# EAGLE board AAA_PowerSupply_Multi (EAGLE 9.6.2)
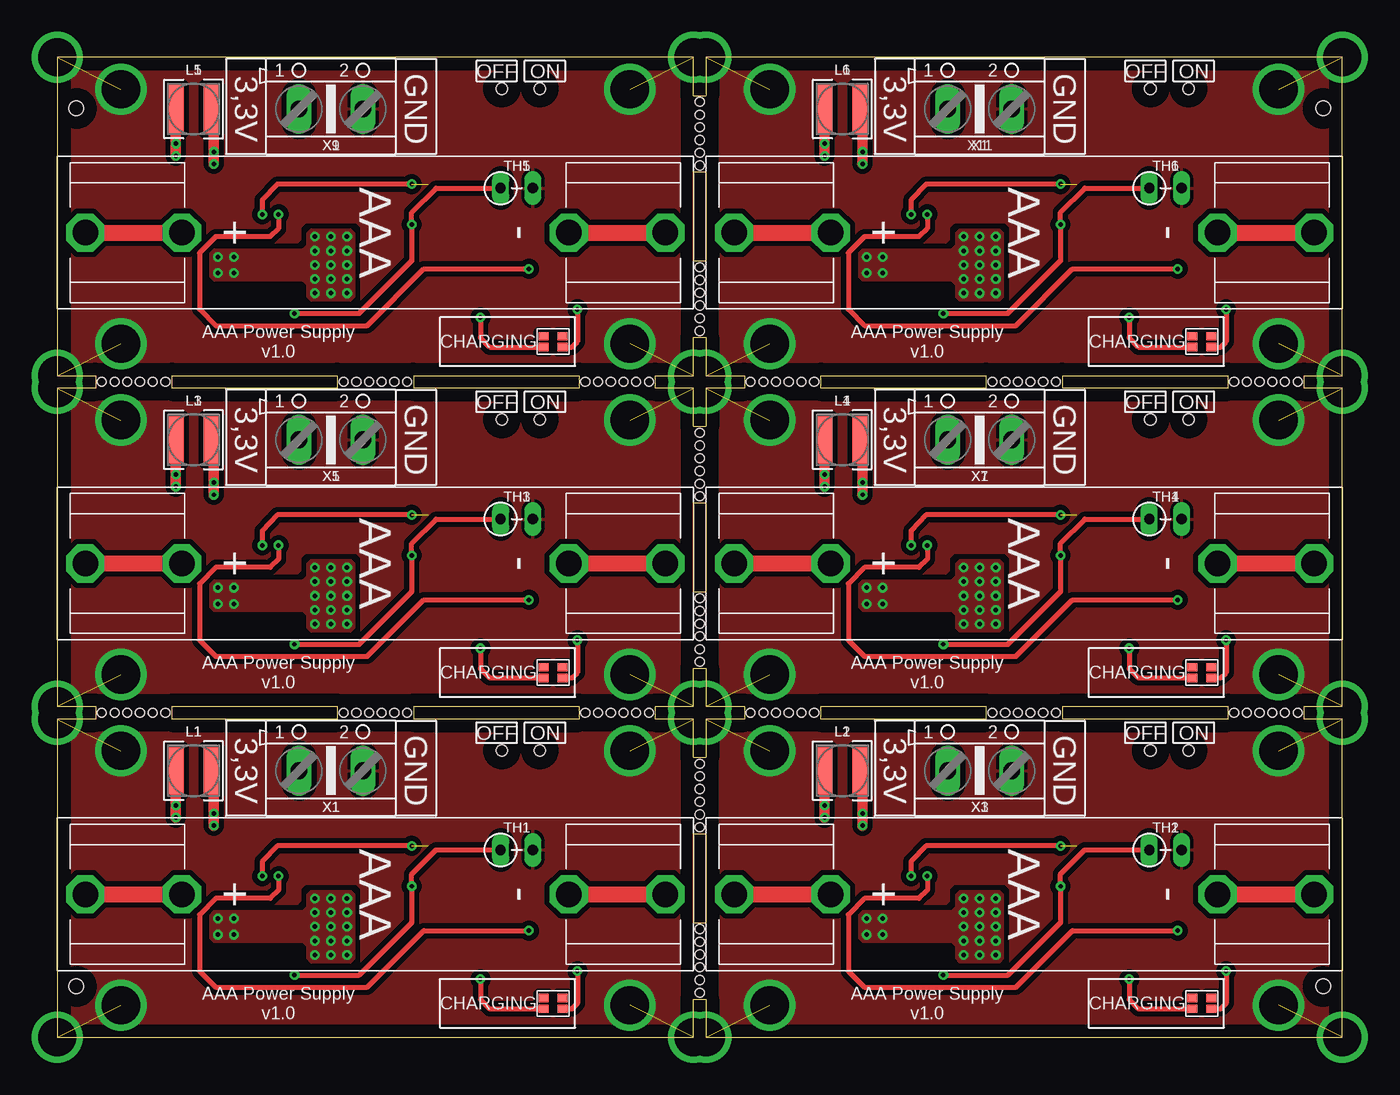
[diagram p0: board, top side]
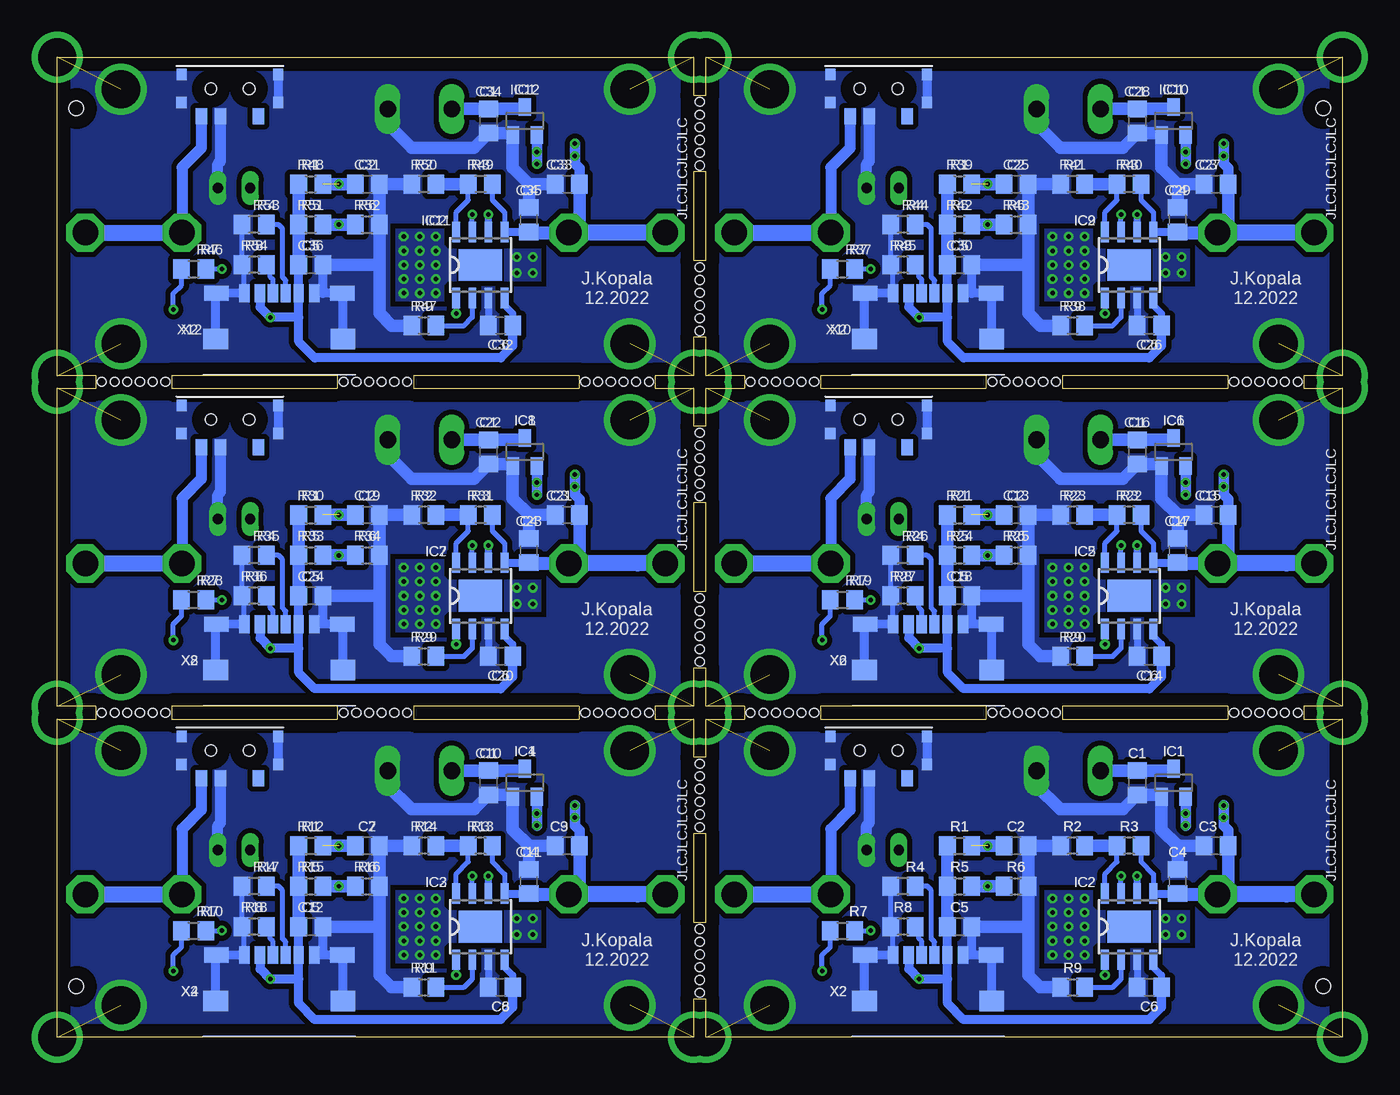
[diagram p1: board, bottom side, seen from below]

Size 101 x 77 mm. Coordinates in mm from the lower left corner, seen from the top.
Outline: 0,0 50,0 50,3 51,3 51,0 101,0 101,25 98,25 98,26 101,26 101,51 98,51 98,52 101,52 101,77 51,77 51,74 50,74 50,77 0,77 0,52 3,52 3,51 0,51 0,26 3,26 3,25 0,25 0,0
Outline: 50,9 50,16 51,16 51,9 50,9
Outline: 50,22 50,25 47,25 47,26 50,26 50,29 51,29 51,26 54,26 54,25 51,25 51,22 50,22
Outline: 41,25 28,25 28,26 41,26 41,25
Outline: 22,25 9,25 9,26 22,26 22,25
Outline: 92,25 79,25 79,26 92,26 92,25
Outline: 73,25 60,25 60,26 73,26 73,25
Outline: 50,35 50,42 51,42 51,35 50,35
Outline: 50,48 50,51 47,51 47,52 50,52 50,55 51,55 51,52 54,52 54,51 51,51 51,48 50,48
Outline: 41,51 28,51 28,52 41,52 41,51
Outline: 22,51 9,51 9,52 22,52 22,51
Outline: 92,51 79,51 79,52 92,52 92,51
Outline: 73,51 60,51 60,52 73,52 73,51
Outline: 50,61 50,68 51,68 51,61 50,61
Copper layers (1*16): Top 0.035mm / dielectric 1.5mm / Bottom 0.035mm
Design rules "default": minimum track width 6mil, minimum drill 0.35mm, track to track 6mil, track to pad 6mil, pad to pad 6mil, via to via 6mil, smd to smd 6mil, copper to edge 40mil, drill to drill 6mil, minimum pad ring 10mil, minimum via ring 8mil, stop-mask expansion 4mil, vias tented up to drill 0mil, thermal gap 10mil
Holes 0.7 mm at 50.5,16.5 50.5,17.5 50.5,18.5 50.5,19.5 50.5,20.5 50.5,21.5 50.5,3.5 50.5,4.5 50.5,5.5 50.5,6.5 50.5,7.5 50.5,8.5 46.5,25.5 45.5,25.5 44.5,25.5 43.5,25.5 42.5,25.5 41.5,25.5 59.5,25.5 58.5,25.5 57.5,25.5 56.5,25.5 55.5,25.5 54.5,25.5 97.5,25.5 96.5,25.5 95.5,25.5 94.5,25.5 93.5,25.5 92.5,25.5 8.5,25.5 7.5,25.5 6.5,25.5 5.5,25.5 4.5,25.5 3.5,25.5 27.5,25.5 26.5,25.5 25.5,25.5 24.5,25.5 23.5,25.5 22.5,25.5 78.5,25.5 77.5,25.5 76.5,25.5 75.5,25.5 74.5,25.5 73.5,25.5 50.5,42.5 50.5,43.5 50.5,44.5 50.5,45.5 50.5,46.5 50.5,47.5 50.5,29.5 50.5,30.5 50.5,31.5 50.5,32.5 50.5,33.5 50.5,34.5 46.5,51.5 45.5,51.5 44.5,51.5 43.5,51.5 42.5,51.5 41.5,51.5 59.5,51.5 58.5,51.5 57.5,51.5 56.5,51.5 55.5,51.5 54.5,51.5 97.5,51.5 96.5,51.5 95.5,51.5 94.5,51.5 93.5,51.5 92.5,51.5 8.5,51.5 7.5,51.5 6.5,51.5 5.5,51.5 4.5,51.5 3.5,51.5 27.5,51.5 26.5,51.5 25.5,51.5 24.5,51.5 23.5,51.5 22.5,51.5 78.5,51.5 77.5,51.5 76.5,51.5 75.5,51.5 74.5,51.5 73.5,51.5 50.5,68.5 50.5,69.5 50.5,70.5 50.5,71.5 50.5,72.5 50.5,73.5 50.5,55.5 50.5,56.5 50.5,57.5 50.5,58.5 50.5,59.5 50.5,60.5
Holes 1.15 mm at 1.5,4 99.5,4 1.5,73 99.5,73

## Footprints (pad centres in the part's own frame; a part is rotated, then mirrored left to right if it is on the bottom)
BC-0401 = drill 2 octagon: 1 -22.8,0; 2 -15.2,0; 3 15.2,0; 4 22.8,0
C0805 = smd 1.3 x 1.5: 1 -0.95,0; 2 0.95,0
SOT23 = smd 1 x 1.4: 1 -0.95,-1.1; 2 0.95,-1.1; 3 0,1.1
SOP8_THERMAL = smd 0.6 x 1.6: 1 -1.905,-2.6; 2 -0.635,-2.6; 3 0.635,-2.6; 4 1.905,-2.6; 5 1.905,2.6; 6 0.635,2.6; 7 -0.635,2.6; 8 -1.905,2.6 | smd 3.4 x 2.5: THERMAL 0,0
L-4X4 = smd 1.2 x 3.7: 1 -1.4,0; 2 1.4,0
WL-SFCW-0603 = smd 0.8 x 0.65: P$1 -0.75,0.425; P$2 0.75,0.425; P$3 -0.75,-0.425; P$4 0.75,-0.425
R0805 = smd 1.3 x 1.5: 1 -0.95,0; 2 0.95,0
K3-1296S-E2 = smd 0.9 x 1.25: O -2.25,-2.175; P -0.75,-2.175; S 2.25,-2.175 | smd 0.8 x 0.9: SH1 -3.8,1.1; SH2 3.8,1.1; SH3 -3.82,-1.1; SH4 3.8,-1.1 | hole 0.9: -1.5,0; 1.5,0
RS-2,5 = drill 0.813 long: 1 -1.27,0; 2 1.27,0
AK500/2 = drill 1.321 long: 1 -2.515,0; 2 2.515,0
HC-TYPE-C-6P-01QT = smd 0.8 x 1.4: A5 0.5,2.85; A9 -1.52,2.85; A12 -2.75,2.85; B5 -0.5,2.85; B9 1.52,2.85; B12 2.75,2.85 | smd 1.95 x 1.2: SH1 -4.95,2.85; SH3 4.95,2.85 | smd 1.95 x 1.6: SH2 -5,-0.75; SH4 5,-0.75

## Placement (x,y rotation side)
BAT1  BC-0401  [BC-0401]  25,11.23 180 top
BAT2  BC-0401  [BC-0401]  76,11.23 180 top
BAT3  BC-0401  [BC-0401]  25,37.23 180 top
BAT4  BC-0401  [BC-0401]  76,37.23 180 top
BAT5  BC-0401  [BC-0401]  25,63.23 180 top
BAT6  BC-0401  [BC-0401]  76,63.23 180 top
C1  10uF  [C0805]  16.11,20 270 bottom
C2  1uF  [C0805]  25.64,15.04 0 bottom
C3  10uF  [C0805]  9.92,15.04 180 bottom
C4  10uF  [C0805]  12.94,12.24 90 bottom
C5  10uF  [C0805]  30.08,8.69 0 bottom
C6  10uF  [C0805]  15.16,3.93 180 bottom
C7  1uF  [C0805]  76.64,15.04 0 bottom
C8  10uF  [C0805]  66.16,3.93 180 bottom
C9  10uF  [C0805]  60.92,15.04 180 bottom
C10  10uF  [C0805]  67.11,20 270 bottom
C11  10uF  [C0805]  63.94,12.24 90 bottom
C12  10uF  [C0805]  81.08,8.69 0 bottom
C13  1uF  [C0805]  25.64,41.04 0 bottom
C14  10uF  [C0805]  15.16,29.93 180 bottom
C15  10uF  [C0805]  9.92,41.04 180 bottom
C16  10uF  [C0805]  16.11,46 270 bottom
C17  10uF  [C0805]  12.94,38.24 90 bottom
C18  10uF  [C0805]  30.08,34.69 0 bottom
C19  1uF  [C0805]  76.64,41.04 0 bottom
C20  10uF  [C0805]  66.16,29.93 180 bottom
C21  10uF  [C0805]  60.92,41.04 180 bottom
C22  10uF  [C0805]  67.11,46 270 bottom
C23  10uF  [C0805]  63.94,38.24 90 bottom
C24  10uF  [C0805]  81.08,34.69 0 bottom
C25  1uF  [C0805]  25.64,67.04 0 bottom
C26  10uF  [C0805]  15.16,55.93 180 bottom
C27  10uF  [C0805]  9.92,67.04 180 bottom
C28  10uF  [C0805]  16.11,72 270 bottom
C29  10uF  [C0805]  12.94,64.24 90 bottom
C30  10uF  [C0805]  30.08,60.69 0 bottom
C31  1uF  [C0805]  76.64,67.04 0 bottom
C32  10uF  [C0805]  66.16,55.93 180 bottom
C33  10uF  [C0805]  60.92,67.04 180 bottom
C34  10uF  [C0805]  67.11,72 270 bottom
C35  10uF  [C0805]  63.94,64.24 90 bottom
C36  10uF  [C0805]  81.08,60.69 0 bottom
IC1  BL8536  [SOT23]  13.25,20 0 bottom
IC2  CN3085  [SOP8_THERMAL]  16.75,8.69 0 bottom
IC3  CN3085  [SOP8_THERMAL]  67.75,8.69 0 bottom
IC4  BL8536  [SOT23]  64.25,20 0 bottom
IC5  CN3085  [SOP8_THERMAL]  16.75,34.69 0 bottom
IC6  BL8536  [SOT23]  13.25,46 0 bottom
IC7  CN3085  [SOP8_THERMAL]  67.75,34.69 0 bottom
IC8  BL8536  [SOT23]  64.25,46 0 bottom
IC9  CN3085  [SOP8_THERMAL]  16.75,60.69 0 bottom
IC10  BL8536  [SOT23]  13.25,72 0 bottom
IC11  CN3085  [SOP8_THERMAL]  67.75,60.69 0 bottom
IC12  BL8536  [SOT23]  64.25,72 0 bottom
L1  PSPNAQ4020-2R2M  [L-4X4]  10.71,20.95 0 top
L2  PSPNAQ4020-2R2M  [L-4X4]  61.71,20.95 0 top
L3  PSPNAQ4020-2R2M  [L-4X4]  10.71,46.95 0 top
L4  PSPNAQ4020-2R2M  [L-4X4]  61.71,46.95 0 top
L5  PSPNAQ4020-2R2M  [L-4X4]  10.71,72.95 0 top
L6  PSPNAQ4020-2R2M  [L-4X4]  61.71,72.95 0 top
LED1  LSG-T676  [WL-SFCW-0603]  38.97,2.66 180 top
LED2  LSG-T676  [WL-SFCW-0603]  89.97,2.66 180 top
LED3  LSG-T676  [WL-SFCW-0603]  38.97,28.66 180 top
LED4  LSG-T676  [WL-SFCW-0603]  89.97,28.66 180 top
LED5  LSG-T676  [WL-SFCW-0603]  38.97,54.66 180 top
LED6  LSG-T676  [WL-SFCW-0603]  89.97,54.66 180 top
R1  47k  [R0805]  30.08,15.04 0 bottom
R2  10k  [R0805]  21.19,15.04 180 bottom
R3  2,7k  [R0805]  16.75,15.04 180 bottom
R4  5,1k  [R0805]  34.52,11.87 180 bottom
R5  5,6k  [R0805]  30.08,11.87 0 bottom
R6  68k  [R0805]  25.64,11.87 0 bottom
R7  1k  [R0805]  39.29,8.37 0 bottom
R8  5,1k  [R0805]  34.52,8.69 180 bottom
R9  2,7k  [R0805]  21.19,3.93 0 bottom
R10  1k  [R0805]  90.29,8.37 0 bottom
R11  2,7k  [R0805]  72.19,3.93 0 bottom
R12  47k  [R0805]  81.08,15.04 0 bottom
R13  2,7k  [R0805]  67.75,15.04 180 bottom
R14  10k  [R0805]  72.19,15.04 180 bottom
R15  5,6k  [R0805]  81.08,11.87 0 bottom
R16  68k  [R0805]  76.64,11.87 0 bottom
R17  5,1k  [R0805]  85.53,11.87 180 bottom
R18  5,1k  [R0805]  85.53,8.69 180 bottom
R19  1k  [R0805]  39.29,34.37 0 bottom
R20  2,7k  [R0805]  21.19,29.93 0 bottom
R21  47k  [R0805]  30.08,41.04 0 bottom
R22  2,7k  [R0805]  16.75,41.04 180 bottom
R23  10k  [R0805]  21.19,41.04 180 bottom
R24  5,6k  [R0805]  30.08,37.87 0 bottom
R25  68k  [R0805]  25.64,37.87 0 bottom
R26  5,1k  [R0805]  34.52,37.87 180 bottom
R27  5,1k  [R0805]  34.52,34.69 180 bottom
R28  1k  [R0805]  90.29,34.37 0 bottom
R29  2,7k  [R0805]  72.19,29.93 0 bottom
R30  47k  [R0805]  81.08,41.04 0 bottom
R31  2,7k  [R0805]  67.75,41.04 180 bottom
R32  10k  [R0805]  72.19,41.04 180 bottom
R33  5,6k  [R0805]  81.08,37.87 0 bottom
R34  68k  [R0805]  76.64,37.87 0 bottom
R35  5,1k  [R0805]  85.53,37.87 180 bottom
R36  5,1k  [R0805]  85.53,34.69 180 bottom
R37  1k  [R0805]  39.29,60.37 0 bottom
R38  2,7k  [R0805]  21.19,55.93 0 bottom
R39  47k  [R0805]  30.08,67.04 0 bottom
R40  2,7k  [R0805]  16.75,67.04 180 bottom
R41  10k  [R0805]  21.19,67.04 180 bottom
R42  5,6k  [R0805]  30.08,63.87 0 bottom
R43  68k  [R0805]  25.64,63.87 0 bottom
R44  5,1k  [R0805]  34.52,63.87 180 bottom
R45  5,1k  [R0805]  34.52,60.69 180 bottom
R46  1k  [R0805]  90.29,60.37 0 bottom
R47  2,7k  [R0805]  72.19,55.93 0 bottom
R48  47k  [R0805]  81.08,67.04 0 bottom
R49  2,7k  [R0805]  67.75,67.04 180 bottom
R50  10k  [R0805]  72.19,67.04 180 bottom
R51  5,6k  [R0805]  81.08,63.87 0 bottom
R52  68k  [R0805]  76.64,63.87 0 bottom
R53  5,1k  [R0805]  85.53,63.87 180 bottom
R54  5,1k  [R0805]  85.53,60.69 180 bottom
SW1  K3-1296S-E2  [K3-1296S-E2]  36.43,22.54 0 bottom
SW2  K3-1296S-E2  [K3-1296S-E2]  87.43,22.54 0 bottom
SW3  K3-1296S-E2  [K3-1296S-E2]  36.43,48.54 0 bottom
SW4  K3-1296S-E2  [K3-1296S-E2]  87.43,48.54 0 bottom
SW5  K3-1296S-E2  [K3-1296S-E2]  36.43,74.54 0 bottom
SW6  K3-1296S-E2  [K3-1296S-E2]  87.43,74.54 0 bottom
TH1  NTCC-10K  [RS-2,5]  36.11,14.72 0 top
TH2  NTCC-10K  [RS-2,5]  87.11,14.72 0 top
TH3  NTCC-10K  [RS-2,5]  36.11,40.72 0 top
TH4  NTCC-10K  [RS-2,5]  87.11,40.72 0 top
TH5  NTCC-10K  [RS-2,5]  36.11,66.72 0 top
TH6  NTCC-10K  [RS-2,5]  87.11,66.72 0 top
X1  [AK500/2]  21.51,20.95 0 top
X2  HC-TYPE-C-6P-01QT  [HC-TYPE-C-6P-01QT]  32.55,3.61 0 bottom
X3  [AK500/2]  72.51,20.95 0 top
X4  HC-TYPE-C-6P-01QT  [HC-TYPE-C-6P-01QT]  83.55,3.61 0 bottom
X5  [AK500/2]  21.51,46.95 0 top
X6  HC-TYPE-C-6P-01QT  [HC-TYPE-C-6P-01QT]  32.55,29.61 0 bottom
X7  [AK500/2]  72.51,46.95 0 top
X8  HC-TYPE-C-6P-01QT  [HC-TYPE-C-6P-01QT]  83.55,29.61 0 bottom
X9  [AK500/2]  21.51,72.95 0 top
X10  HC-TYPE-C-6P-01QT  [HC-TYPE-C-6P-01QT]  32.55,55.61 0 bottom
X11  [AK500/2]  72.51,72.95 0 top
X12  HC-TYPE-C-6P-01QT  [HC-TYPE-C-6P-01QT]  83.55,55.61 0 bottom

## Library data of the parts
BAT1-BAT6 IC1-IC12 LED1-LED6 SW1-SW6 X2 X4 X6 X8 X10 X12 = custom_jatsekku
C1-C36 = rcl; SPICEPREFIX: C
L1-L6 = dp_devices.v6
R1-R54 = rcl; SPICEPREFIX: R
TH1-TH6 = varistor
X1 X3 X5 X7 X9 X11 = con-ptr500; OC_FARNELL: unknown; OC_NEWARK: unknown

## Nets
BAT: BAT1.3 BAT1.4 C3.1 C4.1 IC2.5 L1.1 R3.1
BAT1: BAT2.3 BAT2.4 C9.1 C11.1 IC3.5 L2.1 R13.1
BAT2: BAT3.3 BAT3.4 C15.1 C17.1 IC5.5 L3.1 R22.1
BAT3: BAT4.3 BAT4.4 C21.1 C23.1 IC7.5 L4.1 R31.1
BAT4: BAT5.3 BAT5.4 C27.1 C29.1 IC9.5 L5.1 R40.1
BAT5: BAT6.3 BAT6.4 C33.1 C35.1 IC11.5 L6.1 R49.1
GND: C1.2 C2.2 C3.2 C4.2 C5.2 C6.2 IC1.1 IC2.3 R2.2 R4.2 R6.2 R8.2 R9.1 SW1.P SW1.SH1 SW1.SH2 SW1.SH3 SW1.SH4 TH1.2 X1.2 X2.A12 X2.B12 X2.SH1 X2.SH2 X2.SH3 X2.SH4
GND1: C7.2 C8.2 C9.2 C10.2 C11.2 C12.2 IC3.3 IC4.1 R11.1 R14.2 R16.2 R17.2 R18.2 SW2.P SW2.SH1 SW2.SH2 SW2.SH3 SW2.SH4 TH2.2 X3.2 X4.A12 X4.B12 X4.SH1 X4.SH2 X4.SH3 X4.SH4
GND2: C13.2 C14.2 C15.2 C16.2 C17.2 C18.2 IC5.3 IC6.1 R20.1 R23.2 R25.2 R26.2 R27.2 SW3.P SW3.SH1 SW3.SH2 SW3.SH3 SW3.SH4 TH3.2 X5.2 X6.A12 X6.B12 X6.SH1 X6.SH2 X6.SH3 X6.SH4
GND3: C19.2 C20.2 C21.2 C22.2 C23.2 C24.2 IC7.3 IC8.1 R29.1 R32.2 R34.2 R35.2 R36.2 SW4.P SW4.SH1 SW4.SH2 SW4.SH3 SW4.SH4 TH4.2 X7.2 X8.A12 X8.B12 X8.SH1 X8.SH2 X8.SH3 X8.SH4
GND4: C25.2 C26.2 C27.2 C28.2 C29.2 C30.2 IC9.3 IC10.1 R38.1 R41.2 R43.2 R44.2 R45.2 SW5.P SW5.SH1 SW5.SH2 SW5.SH3 SW5.SH4 TH5.2 X9.2 X10.A12 X10.B12 X10.SH1 X10.SH2 X10.SH3 X10.SH4
GND5: C31.2 C32.2 C33.2 C34.2 C35.2 C36.2 IC11.3 IC12.1 R47.1 R50.2 R52.2 R53.2 R54.2 SW6.P SW6.SH1 SW6.SH2 SW6.SH3 SW6.SH4 TH6.2 X11.2 X12.A12 X12.B12 X12.SH1 X12.SH2 X12.SH3 X12.SH4
N$1: C7.1 IC3.6 R12.2
N$2: IC2.7 R7.2
N$3: LED1.P$1 R7.1
N$4: C2.1 IC2.6 R1.2
N$5: IC2.2 R9.2
N$6: C1.1 IC1.3 X1.1
N$7: IC3.2 R11.2
N$8: IC1.2 L1.2
N$9: IC2.8 R2.1 R3.2
N$10: C10.1 IC4.3 X3.1
N$11: IC4.2 L2.2
N$12: IC2.1 R5.2 R6.1 TH1.1
N$13: IC3.8 R13.2 R14.1
N$14: IC3.1 R15.2 R16.1 TH2.1
N$15: IC3.7 R10.2
N$16: LED2.P$1 R10.1
N$17: BAT1.1 BAT1.2 SW1.O
N$18: R4.1 X2.A5
N$19: R8.1 X2.B5
N$20: BAT2.1 BAT2.2 SW2.O
N$21: R17.1 X4.A5
N$22: R18.1 X4.B5
N$23: C13.1 IC5.6 R21.2
N$24: IC5.2 R20.2
N$25: C16.1 IC6.3 X5.1
N$26: IC6.2 L3.2
N$27: IC5.8 R22.2 R23.1
N$28: IC5.1 R24.2 R25.1 TH3.1
N$29: IC5.7 R19.2
N$30: LED3.P$1 R19.1
N$31: BAT3.1 BAT3.2 SW3.O
N$32: R26.1 X6.A5
N$33: R27.1 X6.B5
N$34: C19.1 IC7.6 R30.2
N$35: IC7.2 R29.2
N$36: C22.1 IC8.3 X7.1
N$37: IC8.2 L4.2
N$38: IC7.8 R31.2 R32.1
N$39: IC7.1 R33.2 R34.1 TH4.1
N$40: IC7.7 R28.2
N$41: LED4.P$1 R28.1
N$42: BAT4.1 BAT4.2 SW4.O
N$43: R35.1 X8.A5
N$44: R36.1 X8.B5
N$45: C25.1 IC9.6 R39.2
N$46: IC9.2 R38.2
N$47: C28.1 IC10.3 X9.1
N$48: IC10.2 L5.2
N$49: IC9.8 R40.2 R41.1
N$50: IC9.1 R42.2 R43.1 TH5.1
N$51: IC9.7 R37.2
N$52: LED5.P$1 R37.1
N$53: BAT5.1 BAT5.2 SW5.O
N$54: R44.1 X10.A5
N$55: R45.1 X10.B5
N$56: C31.1 IC11.6 R48.2
N$57: IC11.2 R47.2
N$58: C34.1 IC12.3 X11.1
N$59: IC12.2 L6.2
N$60: IC11.8 R49.2 R50.1
N$61: IC11.1 R51.2 R52.1 TH6.1
N$62: IC11.7 R46.2
N$63: LED6.P$1 R46.1
N$64: BAT6.1 BAT6.2 SW6.O
N$65: R53.1 X12.A5
N$66: R54.1 X12.B5
VCC: C5.1 C6.1 IC2.4 LED1.P$2 R1.1 R5.1 X2.A9 X2.B9
VCC1: C8.1 C12.1 IC3.4 LED2.P$2 R12.1 R15.1 X4.A9 X4.B9
VCC2: C14.1 C18.1 IC5.4 LED3.P$2 R21.1 R24.1 X6.A9 X6.B9
VCC3: C20.1 C24.1 IC7.4 LED4.P$2 R30.1 R33.1 X8.A9 X8.B9
VCC4: C26.1 C30.1 IC9.4 LED5.P$2 R39.1 R42.1 X10.A9 X10.B9
VCC5: C32.1 C36.1 IC11.4 LED6.P$2 R48.1 R51.1 X12.A9 X12.B9

## Tracks (layer width: path | path; a pad name or v marks a point on that pad's centre or on a via)
BAT  (via drill 0.35)
  Top 0.813: L1.1 v9.31,18.21 v9.31,17.26
  Top 1.27: BAT1.4 BAT1.3
  Bottom 0.406: IC2.5 14.84,12.82 15.79,13.77 R3.1
  Bottom 0.61: IC2.5 C4.1
  Bottom 0.813: C3.1 8.97,16.28 9.31,16.63 v9.31,17.26 v9.31,18.21
  Bottom 0.965: 12.84,11.2 C4.1 12.88,11.23 | 8.81,14.88 C3.1 8.97,12.06 BAT1.3
  Bottom 1.016: 12.88,11.23 BAT1.3 | 4.24,11.35 4.36,11.23
  Bottom 1.27: BAT1.4 4.36,11.23 BAT1.3
BAT1  (via drill 0.35)
  Top 0.813: L2.1 v60.31,18.21 v60.31,17.26
  Top 1.27: BAT2.4 BAT2.3
  Bottom 0.406: IC3.5 65.84,12.82 66.8,13.77 R13.1
  Bottom 0.61: IC3.5 C11.1
  Bottom 0.813: C9.1 59.97,16.28 60.31,16.63 v60.31,17.26 v60.31,18.21
  Bottom 0.965: 63.84,11.2 C11.1 63.88,11.23 | 59.81,14.88 C9.1 59.97,12.06 BAT2.3
  Bottom 1.016: 63.88,11.23 BAT2.3 | 55.24,11.35 55.36,11.23
  Bottom 1.27: BAT2.4 55.36,11.23 BAT2.3
BAT2  (via drill 0.35)
  Top 0.813: L3.1 v9.31,44.22 v9.31,43.26
  Top 1.27: BAT3.4 BAT3.3
  Bottom 0.406: IC5.5 14.84,38.82 15.79,39.77 R22.1
  Bottom 0.61: IC5.5 C17.1
  Bottom 0.813: C15.1 8.97,42.28 9.31,42.63 v9.31,43.26 v9.31,44.22
  Bottom 0.965: 12.84,37.2 C17.1 12.88,37.23 | 8.81,40.88 C15.1 8.97,38.06 BAT3.3
  Bottom 1.016: 12.88,37.23 BAT3.3 | 4.24,37.35 4.36,37.23
  Bottom 1.27: BAT3.4 4.36,37.23 BAT3.3
BAT3  (via drill 0.35)
  Top 0.813: L4.1 v60.31,44.22 v60.31,43.26
  Top 1.27: BAT4.4 BAT4.3
  Bottom 0.406: IC7.5 65.84,38.82 66.8,39.77 R31.1
  Bottom 0.61: IC7.5 C23.1
  Bottom 0.813: C21.1 59.97,42.28 60.31,42.63 v60.31,43.26 v60.31,44.22
  Bottom 0.965: 63.84,37.2 C23.1 63.88,37.23 | 59.81,40.88 C21.1 59.97,38.06 BAT4.3
  Bottom 1.016: 63.88,37.23 BAT4.3 | 55.24,37.35 55.36,37.23
  Bottom 1.27: BAT4.4 55.36,37.23 BAT4.3
BAT4  (via drill 0.35)
  Top 0.813: L5.1 v9.31,70.22 v9.31,69.26
  Top 1.27: BAT5.4 BAT5.3
  Bottom 0.406: IC9.5 14.84,64.82 15.79,65.77 R40.1
  Bottom 0.61: IC9.5 C29.1
  Bottom 0.813: C27.1 8.97,68.28 9.31,68.63 v9.31,69.26 v9.31,70.22
  Bottom 0.965: 12.84,63.2 C29.1 12.88,63.23 | 8.81,66.88 C27.1 8.97,64.06 BAT5.3
  Bottom 1.016: 12.88,63.23 BAT5.3 | 4.24,63.35 4.36,63.23
  Bottom 1.27: BAT5.4 4.36,63.23 BAT5.3
BAT5  (via drill 0.35)
  Top 0.813: L6.1 v60.31,70.22 v60.31,69.26
  Top 1.27: BAT6.4 BAT6.3
  Bottom 0.406: IC11.5 65.84,64.82 66.8,65.77 R49.1
  Bottom 0.61: IC11.5 C35.1
  Bottom 0.813: C33.1 59.97,68.28 60.31,68.63 v60.31,69.26 v60.31,70.22
  Bottom 0.965: 63.84,63.2 C35.1 63.88,63.23 | 59.81,66.88 C33.1 59.97,64.06 BAT6.3
  Bottom 1.016: 63.88,63.23 BAT6.3 | 55.24,63.35 55.36,63.23
  Bottom 1.27: BAT6.4 55.36,63.23 BAT6.3
GND  (via drill 3)  (4 unrouted)
  Bottom 0.406: R4.2 R8.2 35.3,8.52 X2.A12
  Bottom 0.508: R6.2
  Bottom 0.559: IC2.3 C6.2
  Bottom 0.711: C5.2 29.13,6.46 | X2.SH4 27.55,6.41 X2.SH3 29.13,6.46 | X2.SH2 37.55,6.41 X2.SH1 X2.A12 | 29.13,6.46 X2.B12 | SW1.SH2 SW1.SH4
  Bottom 0.864: SW1.P 37.18,16.83 37.38,16.63 TH1.2
  Bottom 0.965: R2.2 C2.2 24.68,15.04 R6.2 24.68,8.69 | 24.68,8.69 24.68,4.88 23.73,3.93 R9.1 | C5.2 24.68,8.69 | C3.2 12.94,15.04 | 12.94,15.04 C4.2 | 12.94,15.04 14.2,16.31 IC1.1 14.35,19.05 C1.2 17.26,17.9 22.14,17.9 24.02,19.78 X1.2
  other vias: 5,2.5 5,22.5 45,2.5 45,22.5 0,0 0,25 50,0 50,25
  pour Bottom (isolate 0.406, rank 2, no thermals): 1,1 1,24 49,24 49,1
  pour Top (isolate 0.406, rank 2): 1,1 1,24 49,24 49,1
GND1  (via drill 3)  (4 unrouted)
  Bottom 0.406: R17.2 R18.2 86.3,8.52 X4.A12
  Bottom 0.508: R16.2
  Bottom 0.559: IC3.3 C8.2
  Bottom 0.711: C12.2 80.13,6.46 | X4.SH4 78.55,6.41 X4.SH3 80.13,6.46 | X4.SH2 88.55,6.41 X4.SH1 X4.A12 | 80.13,6.46 X4.B12 | SW2.SH2 SW2.SH4
  Bottom 0.864: SW2.P 88.18,16.83 88.38,16.63 TH2.2
  Bottom 0.965: R14.2 C7.2 R16.2 75.68,8.69 | 75.68,8.69 75.69,4.88 74.73,3.93 R11.1 | C12.2 75.68,8.69 | C9.2 63.94,15.04 | 63.94,15.04 C11.2 | 63.94,15.04 65.2,16.31 IC4.1 65.35,19.05 C10.2 68.26,17.9 73.14,17.9 75.02,19.78 X3.2
  other vias: 56,2.5 56,22.5 96,2.5 96,22.5 51,0 51,25 101,0 101,25
  pour Bottom (isolate 0.406, rank 2, no thermals): 52,1 52,24 100,24 100,1
  pour Top (isolate 0.406, rank 2): 52,1 52,24 100,24 100,1
GND2  (via drill 3)  (4 unrouted)
  Bottom 0.406: R26.2 R27.2 35.3,34.52 X6.A12
  Bottom 0.508: R25.2
  Bottom 0.559: IC5.3 C14.2
  Bottom 0.711: C18.2 29.13,32.46 | X6.SH4 27.55,32.41 X6.SH3 29.13,32.46 | X6.SH2 37.55,32.41 X6.SH1 X6.A12 | 29.13,32.46 X6.B12 | SW3.SH2 SW3.SH4
  Bottom 0.864: SW3.P 37.18,42.83 37.38,42.63 TH3.2
  Bottom 0.965: R23.2 C13.2 24.68,41.04 R25.2 24.68,34.69 | 24.68,34.69 24.68,30.88 23.73,29.93 R20.1 | C18.2 24.68,34.69 | C15.2 12.94,41.04 | 12.94,41.04 C17.2 | 12.94,41.04 14.2,42.31 IC6.1 14.35,45.05 C16.2 17.26,43.9 22.14,43.9 24.02,45.78 X5.2
  other vias: 5,28.5 5,48.5 45,28.5 45,48.5 0,26 0,51 50,26 50,51
  pour Bottom (isolate 0.406, rank 2, no thermals): 1,27 1,50 49,50 49,27
  pour Top (isolate 0.406, rank 2): 1,27 1,50 49,50 49,27
GND3  (via drill 3)  (4 unrouted)
  Bottom 0.406: R35.2 R36.2 86.3,34.52 X8.A12
  Bottom 0.508: R34.2
  Bottom 0.559: IC7.3 C20.2
  Bottom 0.711: C24.2 80.13,32.46 | X8.SH4 78.55,32.41 X8.SH3 80.13,32.46 | X8.SH2 88.55,32.41 X8.SH1 X8.A12 | 80.13,32.46 X8.B12 | SW4.SH2 SW4.SH4
  Bottom 0.864: SW4.P 88.18,42.83 88.38,42.63 TH4.2
  Bottom 0.965: R32.2 C19.2 R34.2 75.68,34.69 | 75.68,34.69 75.69,30.88 74.73,29.93 R29.1 | C24.2 75.68,34.69 | C21.2 63.94,41.04 | 63.94,41.04 C23.2 | 63.94,41.04 65.2,42.31 IC8.1 65.35,45.05 C22.2 68.26,43.9 73.14,43.9 75.02,45.78 X7.2
  other vias: 56,28.5 56,48.5 96,28.5 96,48.5 51,26 51,51 101,26 101,51
  pour Bottom (isolate 0.406, rank 2, no thermals): 52,27 52,50 100,50 100,27
  pour Top (isolate 0.406, rank 2): 52,27 52,50 100,50 100,27
GND4  (via drill 3)  (4 unrouted)
  Bottom 0.406: R44.2 R45.2 35.3,60.52 X10.A12
  Bottom 0.508: R43.2
  Bottom 0.559: IC9.3 C26.2
  Bottom 0.711: C30.2 29.13,58.46 | X10.SH4 27.55,58.41 X10.SH3 29.13,58.46 | X10.SH2 37.55,58.41 X10.SH1 X10.A12 | 29.13,58.46 X10.B12 | SW5.SH2 SW5.SH4
  Bottom 0.864: SW5.P 37.18,68.83 37.38,68.63 TH5.2
  Bottom 0.965: R41.2 C25.2 24.68,67.04 R43.2 24.68,60.69 | 24.68,60.69 24.68,56.88 23.73,55.93 R38.1 | C30.2 24.68,60.69 | C27.2 12.94,67.04 | 12.94,67.04 C29.2 | 12.94,67.04 14.2,68.31 IC10.1 14.35,71.05 C28.2 17.26,69.9 22.14,69.9 24.02,71.78 X9.2
  other vias: 5,54.5 5,74.5 45,54.5 45,74.5 0,52 0,77 50,52 50,77
  pour Bottom (isolate 0.406, rank 2, no thermals): 1,53 1,76 49,76 49,53
  pour Top (isolate 0.406, rank 2): 1,53 1,76 49,76 49,53
GND5  (via drill 3)  (4 unrouted)
  Bottom 0.406: R53.2 R54.2 86.3,60.52 X12.A12
  Bottom 0.508: R52.2
  Bottom 0.559: IC11.3 C32.2
  Bottom 0.711: C36.2 80.13,58.46 | X12.SH4 78.55,58.41 X12.SH3 80.13,58.46 | X12.SH2 88.55,58.41 X12.SH1 X12.A12 | 80.13,58.46 X12.B12 | SW6.SH2 SW6.SH4
  Bottom 0.864: SW6.P 88.18,68.83 88.38,68.63 TH6.2
  Bottom 0.965: R50.2 C31.2 R52.2 75.68,60.69 | 75.68,60.69 75.69,56.88 74.73,55.93 R47.1 | C36.2 75.68,60.69 | C33.2 63.94,67.04 | 63.94,67.04 C35.2 | 63.94,67.04 65.2,68.31 IC12.1 65.35,71.05 C34.2 68.26,69.9 73.14,69.9 75.02,71.78 X11.2
  other vias: 56,54.5 56,74.5 96,54.5 96,74.5 51,52 51,77 101,52 101,77
  pour Bottom (isolate 0.406, rank 2, no thermals): 52,53 52,76 100,76 100,53
  pour Top (isolate 0.406, rank 2): 52,53 52,76 100,76 100,53
N$1  (via drill 0.35)  (1 unrouted)
  Top 0.406: v78.86,15.04 68.29,15.04 67.11,13.81 v67.11,12.66
  Bottom 0.559: IC3.6 v67.11,12.66
  Bottom 0.965: R12.2 C7.1
N$2  (via drill 0.35)
  Top 0.406: v17.38,12.66 17.38,11.55 16.75,10.91 12.46,10.91 11.19,9.64 11.19,5.2 12.46,3.93 24.36,3.93 28.81,8.37 v37.06,8.37
  Bottom 0.406: IC2.7 v17.38,12.66 | R7.2 v37.06,8.37
N$3  (via drill 0.35)
  Top 0.406: LED1.P$1 40.45,2.23 40.88,2.66 v40.88,5.2
  Bottom 0.406: v40.88,5.2 40.88,6.47 40.24,7.11 R7.1
N$4  (via drill 0.35)  (1 unrouted)
  Top 0.406: v27.86,15.04 17.29,15.04 16.11,13.81 v16.11,12.66
  Bottom 0.559: IC2.6 v16.11,12.66
  Bottom 0.965: R1.2 C2.1
N$5
  Bottom 0.406: IC2.2 17.38,4.56 18.02,3.93 R9.2
N$6
  Bottom 0.965: IC1.3 13.4,20.95 C1.1 X1.1
N$7
  Bottom 0.406: IC3.2 68.38,4.56 69.02,3.93 R11.2
N$8  (via drill 0.35)
  Top 0.711: 12.3,20.76 L1.2
  Top 0.813: v12.3,16.63 v12.3,17.58 12.3,20.76
  Bottom 0.813: IC1.2 v12.3,17.58 v12.3,16.63
N$9
  Bottom 0.406: IC2.8 18.65,12.82 17.7,13.77 R3.2
  Bottom 0.965: R2.1 R3.2
N$10
  Bottom 0.965: IC4.3 64.4,20.95 C10.1 X3.1
N$11  (via drill 0.35)
  Top 0.711: 63.3,20.76 L2.2
  Top 0.813: v63.3,16.63 v63.3,17.58 63.3,20.76
  Bottom 0.813: IC4.2 v63.3,17.58 v63.3,16.63
N$12  (via drill 0.35)
  Top 0.406: v18.65,4.88 23.73,4.88 27.86,9.01 v27.86,11.87 27.86,12.82 29.76,14.72 TH1.1
  Bottom 0.406: IC2.1 v18.65,4.88
  Bottom 0.965: R5.2 v27.86,11.87 R6.1
N$13
  Bottom 0.406: IC3.8 69.65,12.82 68.69,13.77 R13.2
  Bottom 0.965: R14.1 R13.2
N$14  (via drill 0.35)
  Top 0.406: v69.65,4.88 74.73,4.88 78.86,9.01 v78.86,11.87 78.86,12.82 80.76,14.72 TH2.1
  Bottom 0.406: IC3.1 v69.65,4.88
  Bottom 0.965: R15.2 v78.86,11.87 R16.1
N$15  (via drill 0.35)
  Top 0.406: v68.38,12.66 68.38,11.55 67.75,10.91 63.46,10.91 62.19,9.64 62.19,5.2 63.46,3.93 75.36,3.93 79.81,8.37 v88.06,8.37
  Bottom 0.406: IC3.7 v68.38,12.66 | R10.2 v88.06,8.37
N$16  (via drill 0.35)
  Top 0.406: LED2.P$1 91.45,2.23 91.88,2.66 v91.88,5.2
  Bottom 0.406: v91.88,5.2 91.88,6.47 91.24,7.11 R10.1
N$17
  Top 1.27: BAT1.2 BAT1.1
  Bottom 0.864: BAT1.2 40.2,16.35 38.68,17.87 SW1.O
  Bottom 1.27: BAT1.1 BAT1.2
N$18
  Bottom 0.406: X2.A5 32.05,7.49 32.3,7.74 32.3,11.55 32.62,11.87 R4.1
N$19
  Bottom 0.406: R8.1 33.26,8.37 33.26,7.74 33.05,7.53 X2.B5
N$20
  Top 1.27: BAT2.2 BAT2.1
  Bottom 0.864: BAT2.2 91.2,16.35 89.68,17.87 SW2.O
  Bottom 1.27: BAT2.1 BAT2.2
N$21
  Bottom 0.406: X4.A5 83.05,7.49 83.3,7.74 83.3,11.55 83.62,11.87 R17.1
N$22
  Bottom 0.406: R18.1 84.25,8.37 84.25,7.74 84.05,7.53 X4.B5
N$23  (via drill 0.35)  (1 unrouted)
  Top 0.406: v27.86,41.04 17.29,41.04 16.11,39.81 v16.11,38.66
  Bottom 0.559: IC5.6 v16.11,38.66
  Bottom 0.965: R21.2 C13.1
N$24
  Bottom 0.406: IC5.2 17.38,30.56 18.02,29.93 R20.2
N$25
  Bottom 0.965: IC6.3 13.4,46.95 C16.1 X5.1
N$26  (via drill 0.35)
  Top 0.711: 12.3,46.76 L3.2
  Top 0.813: v12.3,42.63 v12.3,43.58 12.3,46.76
  Bottom 0.813: IC6.2 v12.3,43.58 v12.3,42.63
N$27
  Bottom 0.406: IC5.8 18.65,38.82 17.7,39.77 R22.2
  Bottom 0.965: R23.1 R22.2
N$28  (via drill 0.35)
  Top 0.406: v18.65,30.88 23.73,30.88 27.86,35.01 v27.86,37.87 27.86,38.82 29.76,40.72 TH3.1
  Bottom 0.406: IC5.1 v18.65,30.88
  Bottom 0.965: R24.2 v27.86,37.87 R25.1
N$29  (via drill 0.35)
  Top 0.406: v17.38,38.66 17.38,37.55 16.75,36.91 12.46,36.91 11.19,35.64 11.19,31.2 12.46,29.93 24.36,29.93 28.81,34.37 v37.06,34.37
  Bottom 0.406: IC5.7 v17.38,38.66 | R19.2 v37.06,34.37
N$30  (via drill 0.35)
  Top 0.406: LED3.P$1 40.45,28.23 40.88,28.66 v40.88,31.2
  Bottom 0.406: v40.88,31.2 40.88,32.47 40.24,33.1 R19.1
N$31
  Top 1.27: BAT3.2 BAT3.1
  Bottom 0.864: BAT3.2 40.2,42.35 38.68,43.87 SW3.O
  Bottom 1.27: BAT3.1 BAT3.2
N$32
  Bottom 0.406: X6.A5 32.05,33.48 32.3,33.74 32.3,37.55 32.62,37.87 R26.1
N$33
  Bottom 0.406: R27.1 33.26,34.37 33.26,33.74 33.05,33.53 X6.B5
N$34  (via drill 0.35)  (1 unrouted)
  Top 0.406: v78.86,41.04 68.29,41.04 67.11,39.81 v67.11,38.66
  Bottom 0.559: IC7.6 v67.11,38.66
  Bottom 0.965: R30.2 C19.1
N$35
  Bottom 0.406: IC7.2 68.38,30.56 69.02,29.93 R29.2
N$36
  Bottom 0.965: IC8.3 64.4,46.95 C22.1 X7.1
N$37  (via drill 0.35)
  Top 0.711: 63.3,46.76 L4.2
  Top 0.813: v63.3,42.63 v63.3,43.58 63.3,46.76
  Bottom 0.813: IC8.2 v63.3,43.58 v63.3,42.63
N$38
  Bottom 0.406: IC7.8 69.65,38.82 68.69,39.77 R31.2
  Bottom 0.965: R32.1 R31.2
N$39  (via drill 0.35)
  Top 0.406: v69.65,30.88 74.73,30.88 78.86,35.01 v78.86,37.87 78.86,38.82 80.76,40.72 TH4.1
  Bottom 0.406: IC7.1 v69.65,30.88
  Bottom 0.965: R33.2 v78.86,37.87 R34.1
N$40  (via drill 0.35)
  Top 0.406: v68.38,38.66 68.38,37.55 67.75,36.91 63.46,36.91 62.19,35.64 62.19,31.2 63.46,29.93 75.36,29.93 79.81,34.37 v88.06,34.37
  Bottom 0.406: IC7.7 v68.38,38.66 | R28.2 v88.06,34.37
N$41  (via drill 0.35)
  Top 0.406: LED4.P$1 91.45,28.23 91.88,28.66 v91.88,31.2
  Bottom 0.406: v91.88,31.2 91.88,32.47 91.24,33.1 R28.1
N$42
  Top 1.27: BAT4.2 BAT4.1
  Bottom 0.864: BAT4.2 91.2,42.35 89.68,43.87 SW4.O
  Bottom 1.27: BAT4.1 BAT4.2
N$43
  Bottom 0.406: X8.A5 83.05,33.48 83.3,33.74 83.3,37.55 83.62,37.87 R35.1
N$44
  Bottom 0.406: R36.1 84.25,34.37 84.25,33.74 84.05,33.53 X8.B5
N$45  (via drill 0.35)  (1 unrouted)
  Top 0.406: v27.86,67.04 17.29,67.04 16.11,65.81 v16.11,64.66
  Bottom 0.559: IC9.6 v16.11,64.66
  Bottom 0.965: R39.2 C25.1
N$46
  Bottom 0.406: IC9.2 17.38,56.56 18.02,55.93 R38.2
N$47
  Bottom 0.965: IC10.3 13.4,72.94 C28.1 X9.1
N$48  (via drill 0.35)
  Top 0.711: 12.3,72.75 L5.2
  Top 0.813: v12.3,68.63 v12.3,69.58 12.3,72.75
  Bottom 0.813: IC10.2 v12.3,69.58 v12.3,68.63
N$49
  Bottom 0.406: IC9.8 18.65,64.82 17.7,65.77 R40.2
  Bottom 0.965: R41.1 R40.2
N$50  (via drill 0.35)
  Top 0.406: v18.65,56.88 23.73,56.88 27.86,61.01 v27.86,63.87 27.86,64.82 29.76,66.72 TH5.1
  Bottom 0.406: IC9.1 v18.65,56.88
  Bottom 0.965: R42.2 v27.86,63.87 R43.1
N$51  (via drill 0.35)
  Top 0.406: v17.38,64.66 17.38,63.55 16.75,62.91 12.46,62.91 11.19,61.64 11.19,57.2 12.46,55.93 24.36,55.93 28.81,60.37 v37.06,60.37
  Bottom 0.406: IC9.7 v17.38,64.66 | R37.2 v37.06,60.37
N$52  (via drill 0.35)
  Top 0.406: LED5.P$1 40.45,54.23 40.88,54.66 v40.88,57.2
  Bottom 0.406: v40.88,57.2 40.88,58.47 40.24,59.1 R37.1
N$53
  Top 1.27: BAT5.2 BAT5.1
  Bottom 0.864: BAT5.2 40.2,68.35 38.68,69.87 SW5.O
  Bottom 1.27: BAT5.1 BAT5.2
N$54
  Bottom 0.406: X10.A5 32.05,59.48 32.3,59.74 32.3,63.55 32.62,63.87 R44.1
N$55
  Bottom 0.406: R45.1 33.26,60.37 33.26,59.74 33.05,59.53 X10.B5
N$56  (via drill 0.35)  (1 unrouted)
  Top 0.406: v78.86,67.04 68.29,67.04 67.11,65.81 v67.11,64.66
  Bottom 0.559: IC11.6 v67.11,64.66
  Bottom 0.965: R48.2 C31.1
N$57
  Bottom 0.406: IC11.2 68.38,56.56 69.02,55.93 R47.2
N$58
  Bottom 0.965: IC12.3 64.4,72.94 C34.1 X11.1
N$59  (via drill 0.35)
  Top 0.711: 63.3,72.75 L6.2
  Top 0.813: v63.3,68.63 v63.3,69.58 63.3,72.75
  Bottom 0.813: IC12.2 v63.3,69.58 v63.3,68.63
N$60
  Bottom 0.406: IC11.8 69.65,64.82 68.69,65.77 R49.2
  Bottom 0.965: R50.1 R49.2
N$61  (via drill 0.35)
  Top 0.406: v69.65,56.88 74.73,56.88 78.86,61.01 v78.86,63.87 78.86,64.82 80.76,66.72 TH6.1
  Bottom 0.406: IC11.1 v69.65,56.88
  Bottom 0.965: R51.2 v78.86,63.87 R52.1
N$62  (via drill 0.35)
  Top 0.406: v68.38,64.66 68.38,63.55 67.75,62.91 63.46,62.91 62.19,61.64 62.19,57.2 63.46,55.93 75.36,55.93 79.81,60.37 v88.06,60.37
  Bottom 0.406: IC11.7 v68.38,64.66 | R46.2 v88.06,60.37
N$63  (via drill 0.35)
  Top 0.406: LED6.P$1 91.45,54.23 91.88,54.66 v91.88,57.2
  Bottom 0.406: v91.88,57.2 91.88,58.47 91.24,59.1 R46.1
N$64
  Top 1.27: BAT6.2 BAT6.1
  Bottom 0.864: BAT6.2 91.2,68.35 89.68,69.87 SW6.O
  Bottom 1.27: BAT6.1 BAT6.2
N$65
  Bottom 0.406: X12.A5 83.05,59.48 83.3,59.74 83.3,63.55 83.62,63.87 R53.1
N$66
  Bottom 0.406: R54.1 84.25,60.37 84.25,59.74 84.05,59.53 X12.B5
THERMAL  (via drill 0.35)
  other vias: 22.78,10.91 20.24,10.91 21.51,10.91 22.78,8.69 21.51,8.69 20.24,8.69 20.24,6.47 21.51,6.47 22.78,6.47 20.24,9.8 21.51,9.8 22.78,9.8 22.78,7.58 21.51,7.58 20.24,7.58 12.62,9.32 12.62,8.05 13.89,9.32 13.89,8.05
  pour Bottom: 11.98,7.42 19.29,7.42 19.6,7.1 19.6,5.83 23.41,5.83 23.41,11.55 19.6,11.55 19.6,10.28 19.29,9.96 11.98,9.96
  pour Top: 19.29,9.96 19.6,10.28 19.6,7.1 19.29,7.42
  pour Top: 11.98,9.64 12.3,9.96 19.29,9.96 19.6,10.28 19.6,11.23 19.92,11.55 23.09,11.55 23.41,11.23 23.41,6.15 23.09,5.83 19.92,5.83 19.6,6.15 19.6,7.1 19.29,7.42 12.3,7.42 11.98,7.74
THERMAL1  (via drill 0.35)
  other vias: 73.78,10.91 71.24,10.91 72.51,10.91 73.78,8.69 72.51,8.69 71.24,8.69 71.24,6.47 72.51,6.47 73.78,6.47 71.24,9.8 72.51,9.8 73.78,9.8 73.78,7.58 72.51,7.58 71.24,7.58 63.62,9.32 63.62,8.05 64.89,9.32 64.89,8.05
  pour Bottom: 62.98,7.42 70.28,7.42 70.6,7.1 70.6,5.83 74.41,5.83 74.41,11.55 70.6,11.55 70.6,10.28 70.28,9.96 62.98,9.96
  pour Top: 70.28,9.96 70.6,10.28 70.6,7.1 70.28,7.42
  pour Top: 62.98,9.64 63.3,9.96 70.28,9.96 70.6,10.28 70.6,11.23 70.92,11.55 74.09,11.55 74.41,11.23 74.41,6.15 74.09,5.83 70.92,5.83 70.6,6.15 70.6,7.1 70.28,7.42 63.3,7.42 62.98,7.74
THERMAL2  (via drill 0.35)
  other vias: 22.78,36.91 20.24,36.91 21.51,36.91 22.78,34.69 21.51,34.69 20.24,34.69 20.24,32.47 21.51,32.47 22.78,32.47 20.24,35.8 21.51,35.8 22.78,35.8 22.78,33.58 21.51,33.58 20.24,33.58 12.62,35.33 12.62,34.05 13.89,35.33 13.89,34.05
  pour Bottom: 11.98,33.42 19.29,33.42 19.6,33.1 19.6,31.83 23.41,31.83 23.41,37.55 19.6,37.55 19.6,36.28 19.29,35.96 11.98,35.96
  pour Top: 19.29,35.96 19.6,36.28 19.6,33.1 19.29,33.42
  pour Top: 11.98,35.64 12.3,35.96 19.29,35.96 19.6,36.28 19.6,37.23 19.92,37.55 23.09,37.55 23.41,37.23 23.41,32.15 23.09,31.83 19.92,31.83 19.6,32.15 19.6,33.1 19.29,33.42 12.3,33.42 11.98,33.74
THERMAL3  (via drill 0.35)
  other vias: 73.78,36.91 71.24,36.91 72.51,36.91 73.78,34.69 72.51,34.69 71.24,34.69 71.24,32.47 72.51,32.47 73.78,32.47 71.24,35.8 72.51,35.8 73.78,35.8 73.78,33.58 72.51,33.58 71.24,33.58 63.62,35.33 63.62,34.05 64.89,35.33 64.89,34.05
  pour Bottom: 62.98,33.42 70.28,33.42 70.6,33.1 70.6,31.83 74.41,31.83 74.41,37.55 70.6,37.55 70.6,36.28 70.28,35.96 62.98,35.96
  pour Top: 70.28,35.96 70.6,36.28 70.6,33.1 70.28,33.42
  pour Top: 62.98,35.64 63.3,35.96 70.28,35.96 70.6,36.28 70.6,37.23 70.92,37.55 74.09,37.55 74.41,37.23 74.41,32.15 74.09,31.83 70.92,31.83 70.6,32.15 70.6,33.1 70.28,33.42 63.3,33.42 62.98,33.74
THERMAL4  (via drill 0.35)
  other vias: 22.78,62.91 20.24,62.91 21.51,62.91 22.78,60.69 21.51,60.69 20.24,60.69 20.24,58.47 21.51,58.47 22.78,58.47 20.24,61.8 21.51,61.8 22.78,61.8 22.78,59.58 21.51,59.58 20.24,59.58 12.62,61.33 12.62,60.05 13.89,61.33 13.89,60.05
  pour Bottom: 11.98,59.42 19.29,59.42 19.6,59.1 19.6,57.83 23.41,57.83 23.41,63.55 19.6,63.55 19.6,62.28 19.29,61.96 11.98,61.96
  pour Top: 19.29,61.96 19.6,62.28 19.6,59.1 19.29,59.42
  pour Top: 11.98,61.64 12.3,61.96 19.29,61.96 19.6,62.28 19.6,63.23 19.92,63.55 23.09,63.55 23.41,63.23 23.41,58.15 23.09,57.83 19.92,57.83 19.6,58.15 19.6,59.1 19.29,59.42 12.3,59.42 11.98,59.74
THERMAL5  (via drill 0.35)
  other vias: 73.78,62.91 71.24,62.91 72.51,62.91 73.78,60.69 72.51,60.69 71.24,60.69 71.24,58.47 72.51,58.47 73.78,58.47 71.24,61.8 72.51,61.8 73.78,61.8 73.78,59.58 72.51,59.58 71.24,59.58 63.62,61.33 63.62,60.05 64.89,61.33 64.89,60.05
  pour Bottom: 62.98,59.42 70.28,59.42 70.6,59.1 70.6,57.83 74.41,57.83 74.41,63.55 70.6,63.55 70.6,62.28 70.28,61.96 62.98,61.96
  pour Top: 70.28,61.96 70.6,62.28 70.6,59.1 70.28,59.42
  pour Top: 62.98,61.64 63.3,61.96 70.28,61.96 70.6,62.28 70.6,63.23 70.92,63.55 74.09,63.55 74.41,63.23 74.41,58.15 74.09,57.83 70.92,57.83 70.6,58.15 70.6,59.1 70.28,59.42 63.3,59.42 62.98,59.74
VCC  (via drill 0.35)
  Top 0.406: LED1.P$2 34,2.23 33.26,2.98 v33.26,4.56
  Bottom 0.559: IC2.4 14.84,5.51 14.21,4.88 C6.1
  Bottom 0.711: C5.1 X2.B9 31.03,4.56 | 15.15,1.4 15.16,1.39 29.76,1.39 31.03,2.65 31.03,4.56 | X2.A9 34.07,5.38 v33.26,4.56 31.03,4.56
  Bottom 0.762: C6.1 14.21,2.34 15.15,1.4
  Bottom 0.965: C5.1 R5.1 R1.1
VCC1  (via drill 0.35)
  Top 0.406: LED2.P$2 85,2.23 84.25,2.98 v84.25,4.56
  Bottom 0.559: IC3.4 65.84,5.51 65.21,4.88 C8.1
  Bottom 0.711: C12.1 X4.B9 82.03,4.56 | 66.15,1.4 66.16,1.39 80.76,1.39 82.03,2.65 82.03,4.56 | X4.A9 85.07,5.38 v84.25,4.56 82.03,4.56
  Bottom 0.762: C8.1 65.21,2.34 66.15,1.4
  Bottom 0.965: C12.1 R15.1 R12.1
VCC2  (via drill 0.35)
  Top 0.406: LED3.P$2 34,28.23 33.26,28.98 v33.26,30.56
  Bottom 0.559: IC5.4 14.84,31.52 14.21,30.88 C14.1
  Bottom 0.711: C18.1 X6.B9 31.03,30.56 | 15.15,27.4 15.16,27.39 29.76,27.39 31.03,28.66 31.03,30.56 | X6.A9 34.07,31.38 v33.26,30.56 31.03,30.56
  Bottom 0.762: C14.1 14.21,28.34 15.15,27.4
  Bottom 0.965: C18.1 R24.1 R21.1
VCC3  (via drill 0.35)
  Top 0.406: LED4.P$2 85,28.23 84.25,28.98 v84.25,30.56
  Bottom 0.559: IC7.4 65.84,31.52 65.21,30.88 C20.1
  Bottom 0.711: C24.1 X8.B9 82.03,30.56 | 66.15,27.4 66.16,27.39 80.76,27.39 82.03,28.66 82.03,30.56 | X8.A9 85.07,31.38 v84.25,30.56 82.03,30.56
  Bottom 0.762: C20.1 65.21,28.34 66.15,27.4
  Bottom 0.965: C24.1 R33.1 R30.1
VCC4  (via drill 0.35)
  Top 0.406: LED5.P$2 34,54.23 33.26,54.98 v33.26,56.56
  Bottom 0.559: IC9.4 14.84,57.52 14.21,56.88 C26.1
  Bottom 0.711: C30.1 X10.B9 31.03,56.56 | 15.15,53.4 15.16,53.39 29.76,53.39 31.03,54.66 31.03,56.56 | X10.A9 34.07,57.38 v33.26,56.56 31.03,56.56
  Bottom 0.762: C26.1 14.21,54.34 15.15,53.4
  Bottom 0.965: C30.1 R42.1 R39.1
VCC5  (via drill 0.35)
  Top 0.406: LED6.P$2 85,54.23 84.25,54.98 v84.25,56.56
  Bottom 0.559: IC11.4 65.84,57.52 65.21,56.88 C32.1
  Bottom 0.711: C36.1 X12.B9 82.03,56.56 | 66.15,53.4 66.16,53.39 80.76,53.39 82.03,54.66 82.03,56.56 | X12.A9 85.07,57.38 v84.25,56.56 82.03,56.56
  Bottom 0.762: C32.1 65.21,54.34 66.15,53.4
  Bottom 0.965: C36.1 R51.1 R48.1

## Text on the board
tPlace: OFF | ON | OFF | ON | 3,3V | GND | 3,3V | GND | AAA Power Supply / v1.0 | CHARGING | AAA Power Supply / v1.0 | CHARGING | OFF | ON | OFF | ON | 3,3V | GND | 3,3V | GND | AAA Power Supply / v1.0 | CHARGING | AAA Power Supply / v1.0 | CHARGING | OFF | ON | OFF | ON | 3,3V | GND | 3,3V | GND | AAA Power Supply / v1.0 | CHARGING | AAA Power Supply / v1.0 | CHARGING
bPlace: JLCJLCJLCJLC | JLCJLCJLCJLC | J.Kopala / 12.2022 | J.Kopala / 12.2022 | JLCJLCJLCJLC | JLCJLCJLCJLC | J.Kopala / 12.2022 | J.Kopala / 12.2022 | JLCJLCJLCJLC | JLCJLCJLCJLC | J.Kopala / 12.2022 | J.Kopala / 12.2022
_tNames: L1 | L1 | X1 | X1 | TH1 | TH1 | L1 | L1 | X1 | X1 | TH1 | TH1 | L1 | L1 | X1 | X1 | TH1 | TH1
_bNames: IC1 | C1 | IC1 | C1 | C3 | R3 | R2 | C2 | R1 | C3 | R3 | R2 | C2 | R1 | C4 | C4 | R6 | R5 | R4 | R6 | R5 | R4 | IC2 | IC2 | C5 | R8 | C5 | R8 | R7 | R7 | R9 | R9 | X2 | X2 | C6 | C6 | IC1 | C1 | IC1 | C1 | C3 | R3 | R2 | C2 | R1 | C3 | R3 | R2 | C2 | R1 | C4 | C4 | R6 | R5 | R4 | R6 | R5 | R4 | IC2 | IC2 | C5 | R8 | C5 | R8 | R7 | R7 | R9 | R9 | X2 | X2 | C6 | C6 | IC1 | C1 | IC1 | C1 | C3 | R3 | R2 | C2 | R1 | C3 | R3 | R2 | C2 | R1 | C4 | C4 | R6 | R5 | R4 | R6 | R5 | R4 | IC2 | IC2 | C5 | R8 | C5 | R8 | R7 | R7 | R9 | R9 | X2 | X2 | C6 | C6